# Altium PCB fpga_board.PcbDoc (part 1 of 2)
Units mil, origin at the board's own origin, x right, y up, seen from the top; angles counter-clockwise.
Board outline 3600 x 2770 mil, 6 copper layers (Top Layer, Layer 1, Layer 2, Layer 3, Layer 4, Bottom Layer), stack 32.112 mil thick; 161 components, 170 nets, 630 pads, 157 vias.
Unrouted connection lines stored in the file: 209.
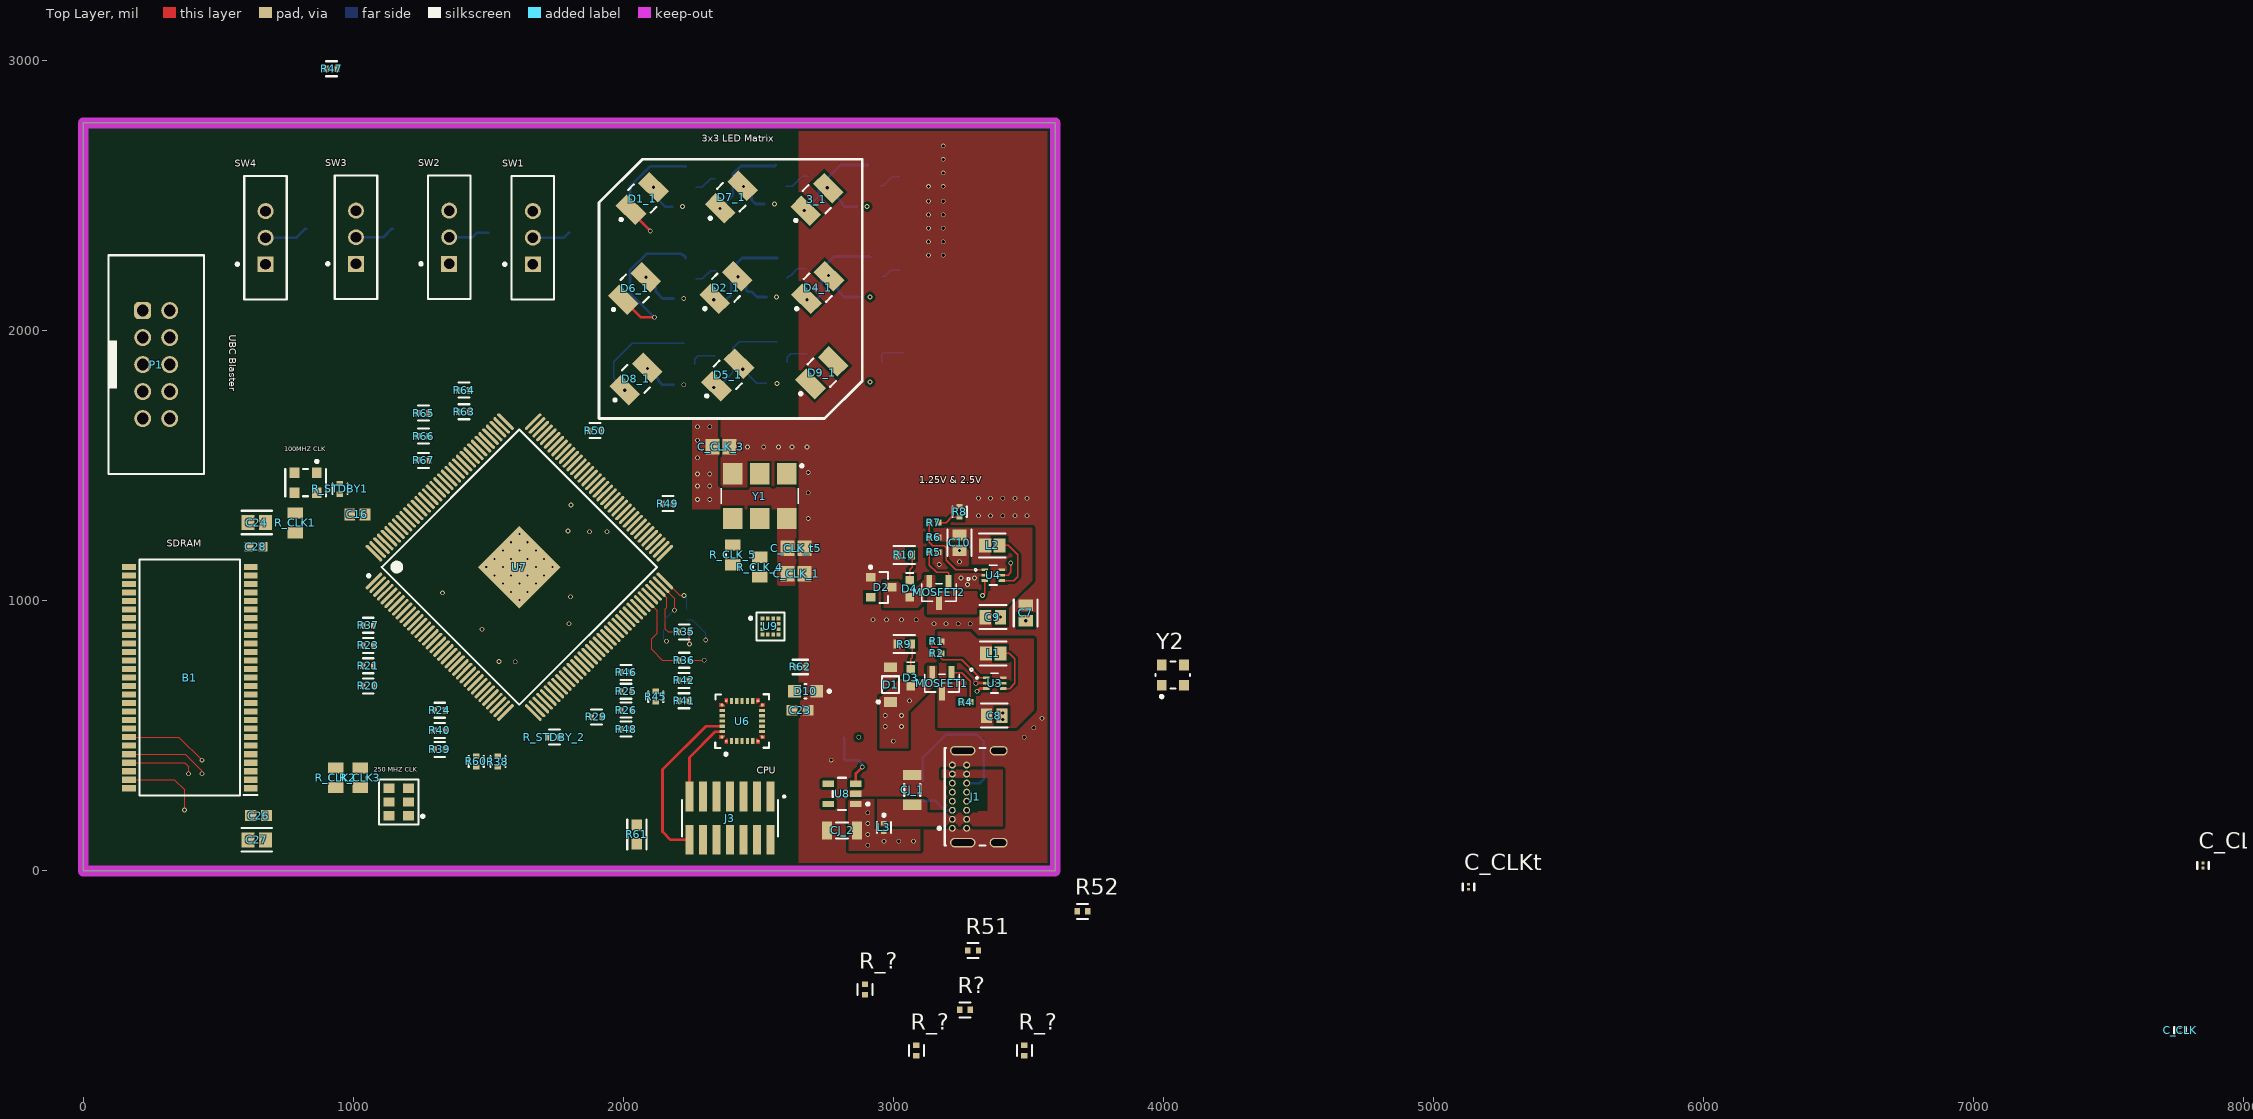
[diagram p0: Top Layer view]
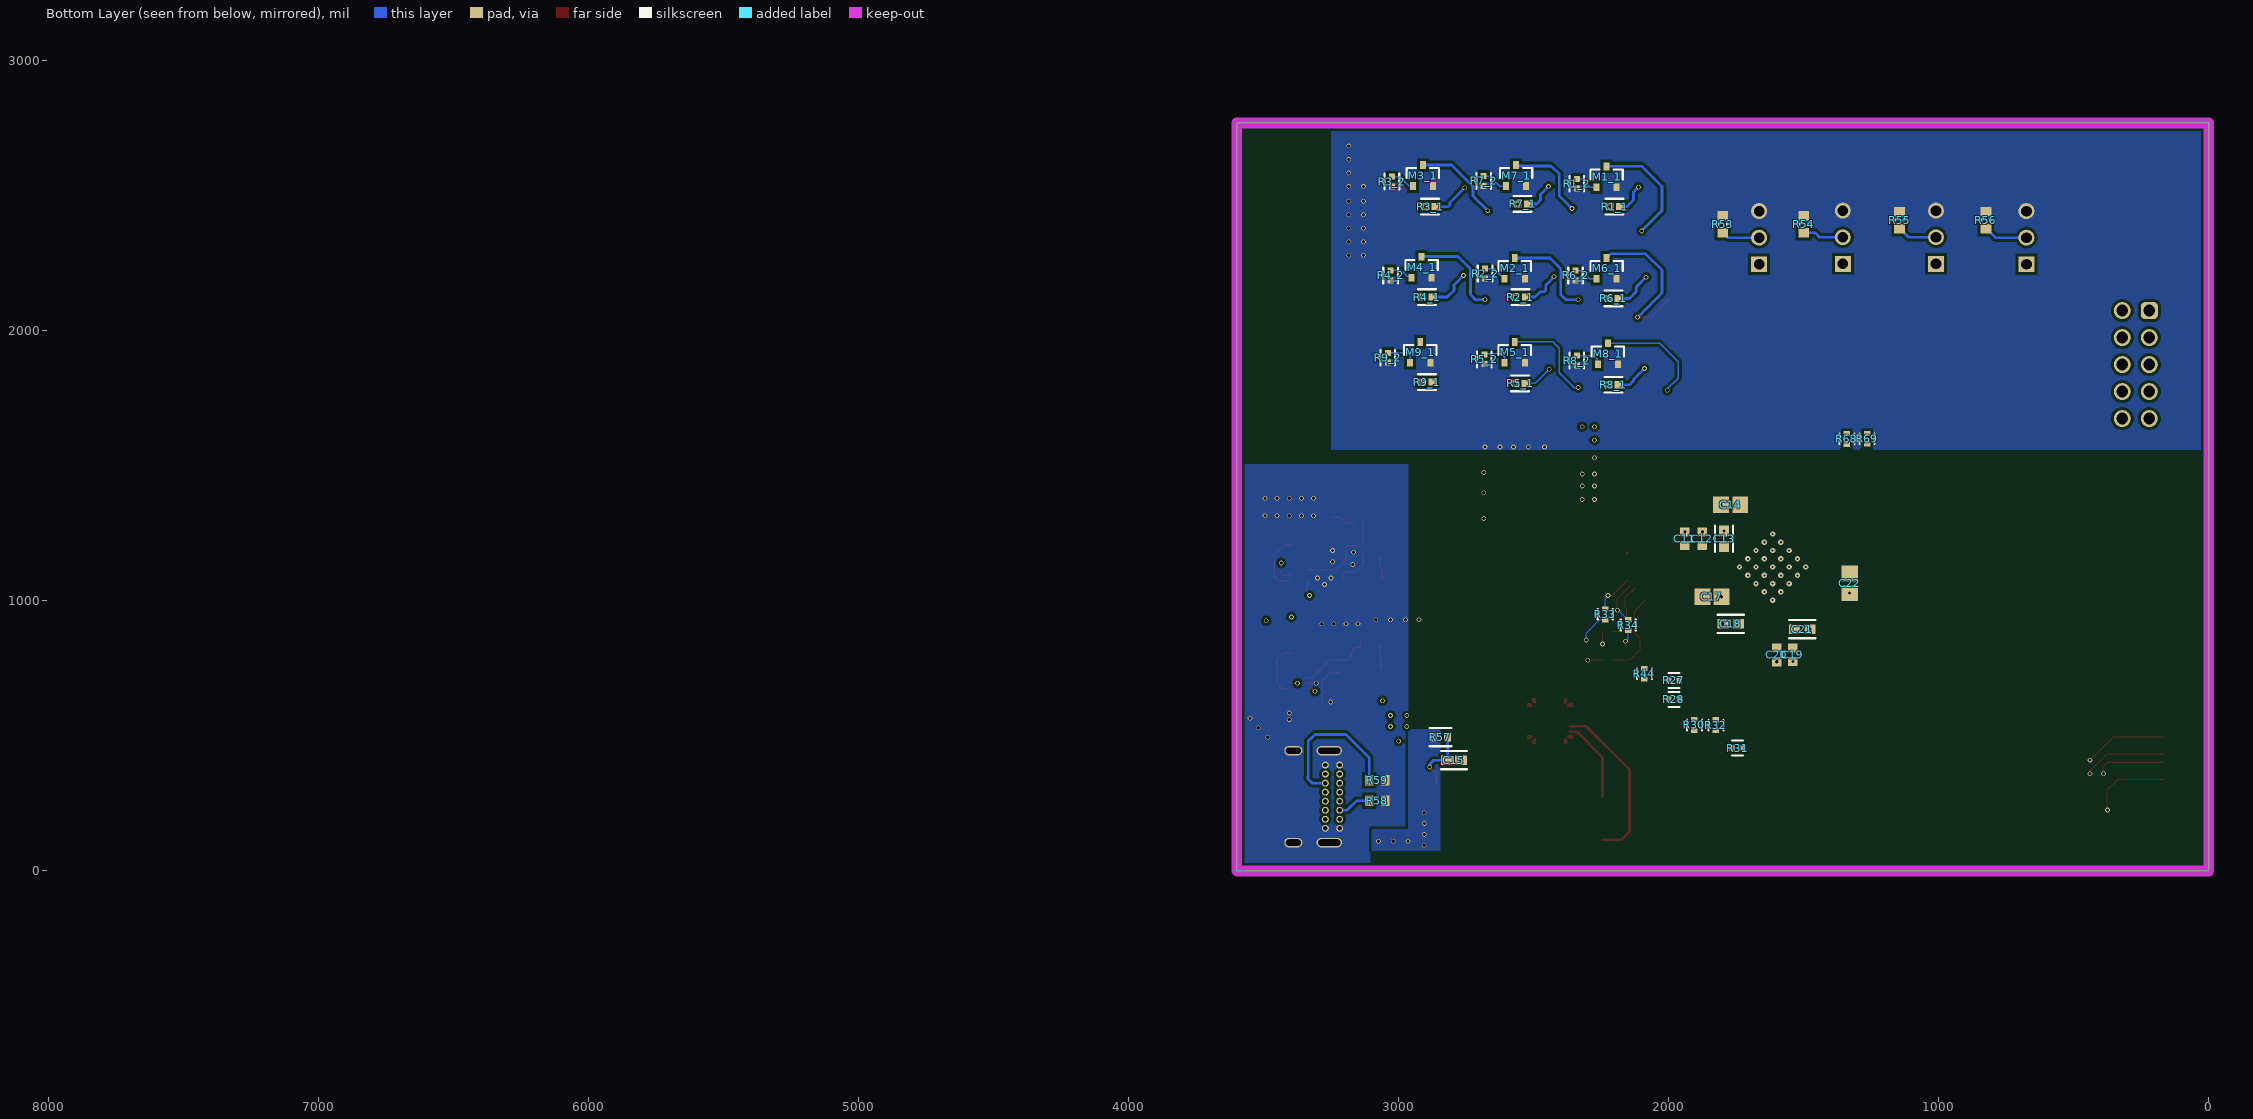
[diagram p1: Bottom Layer view, seen from below]
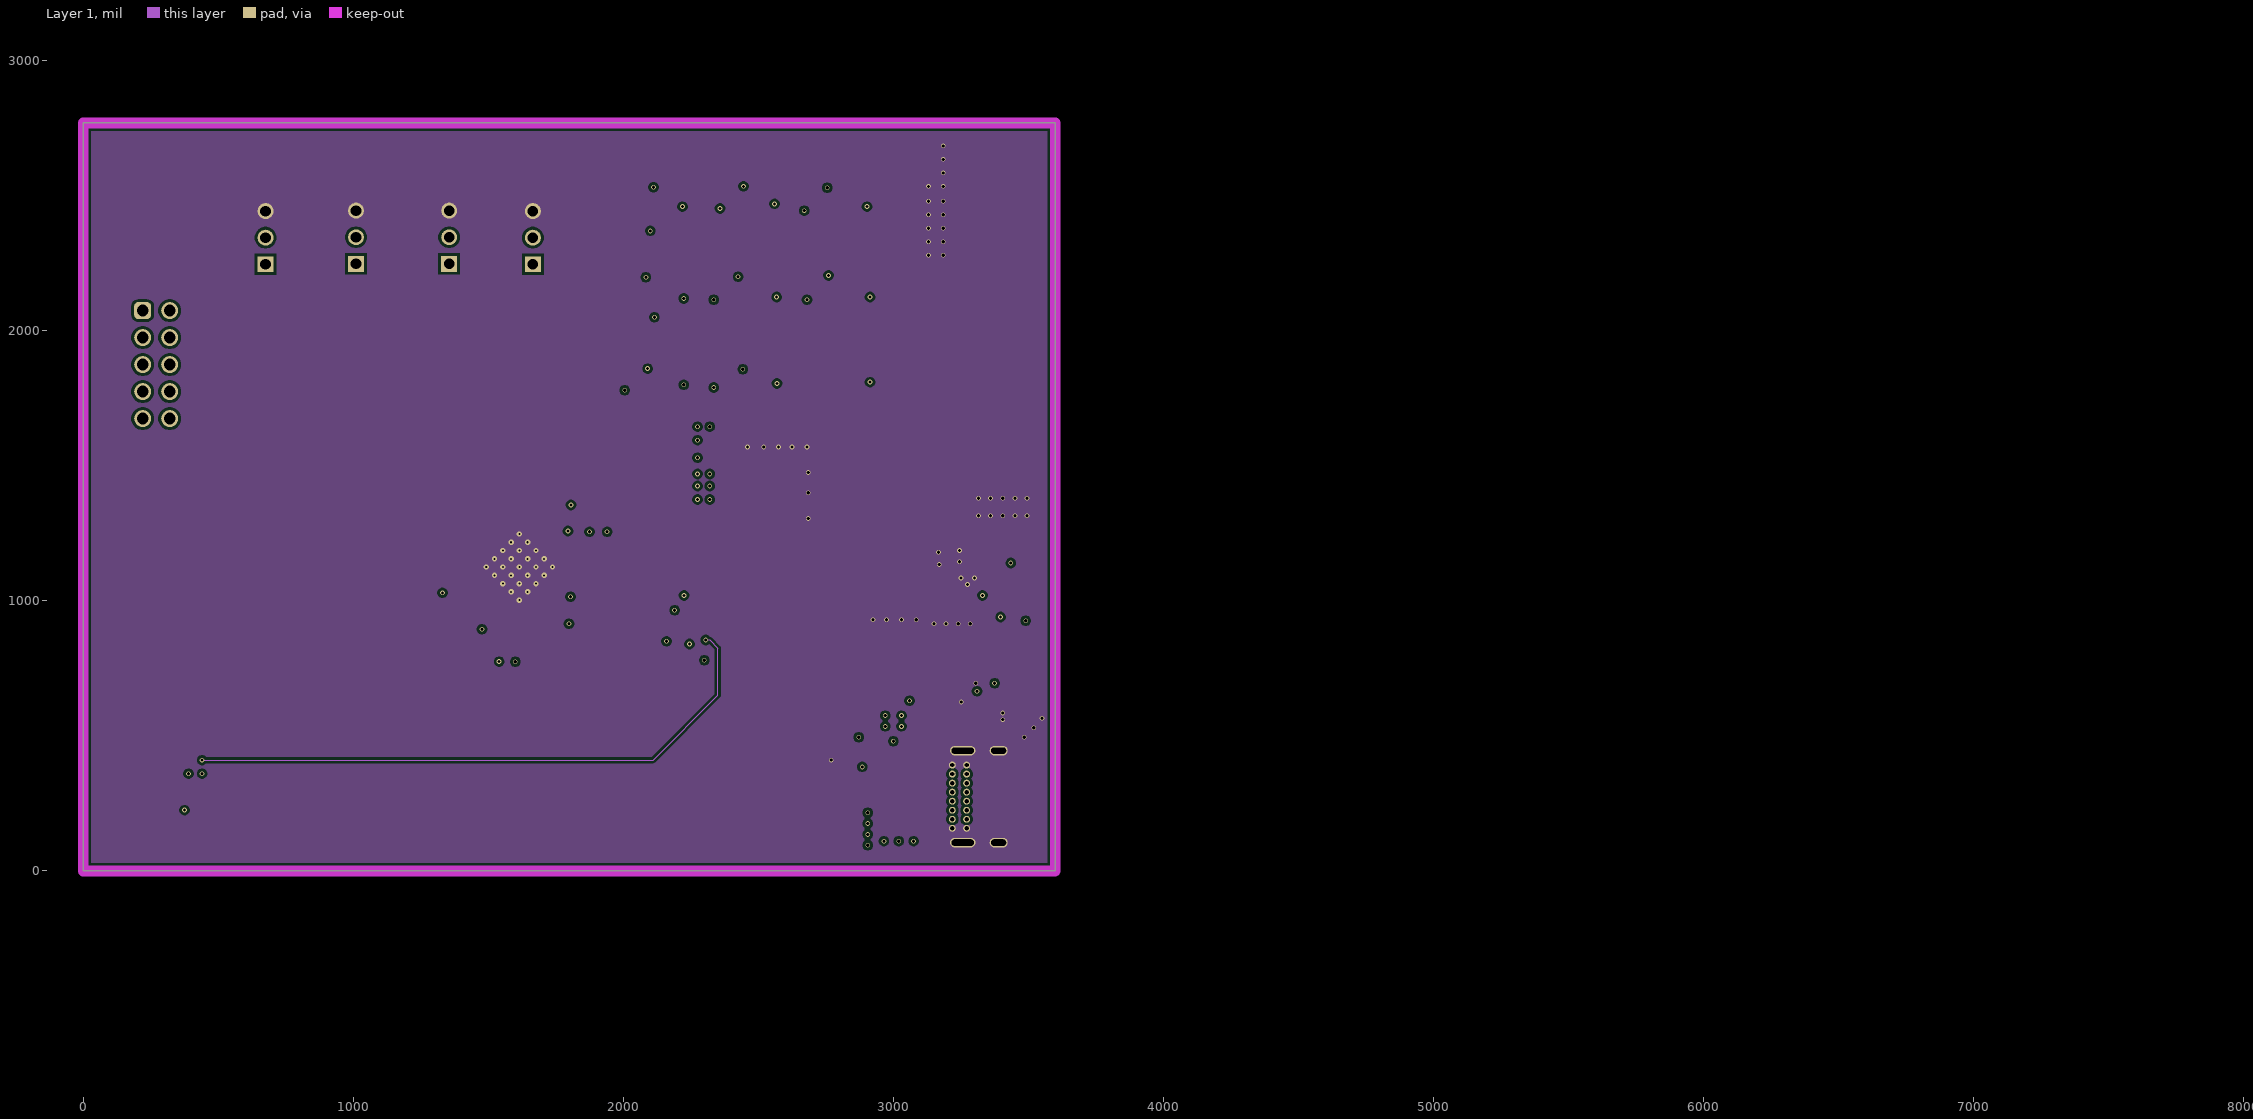
[diagram p2: Layer 1]
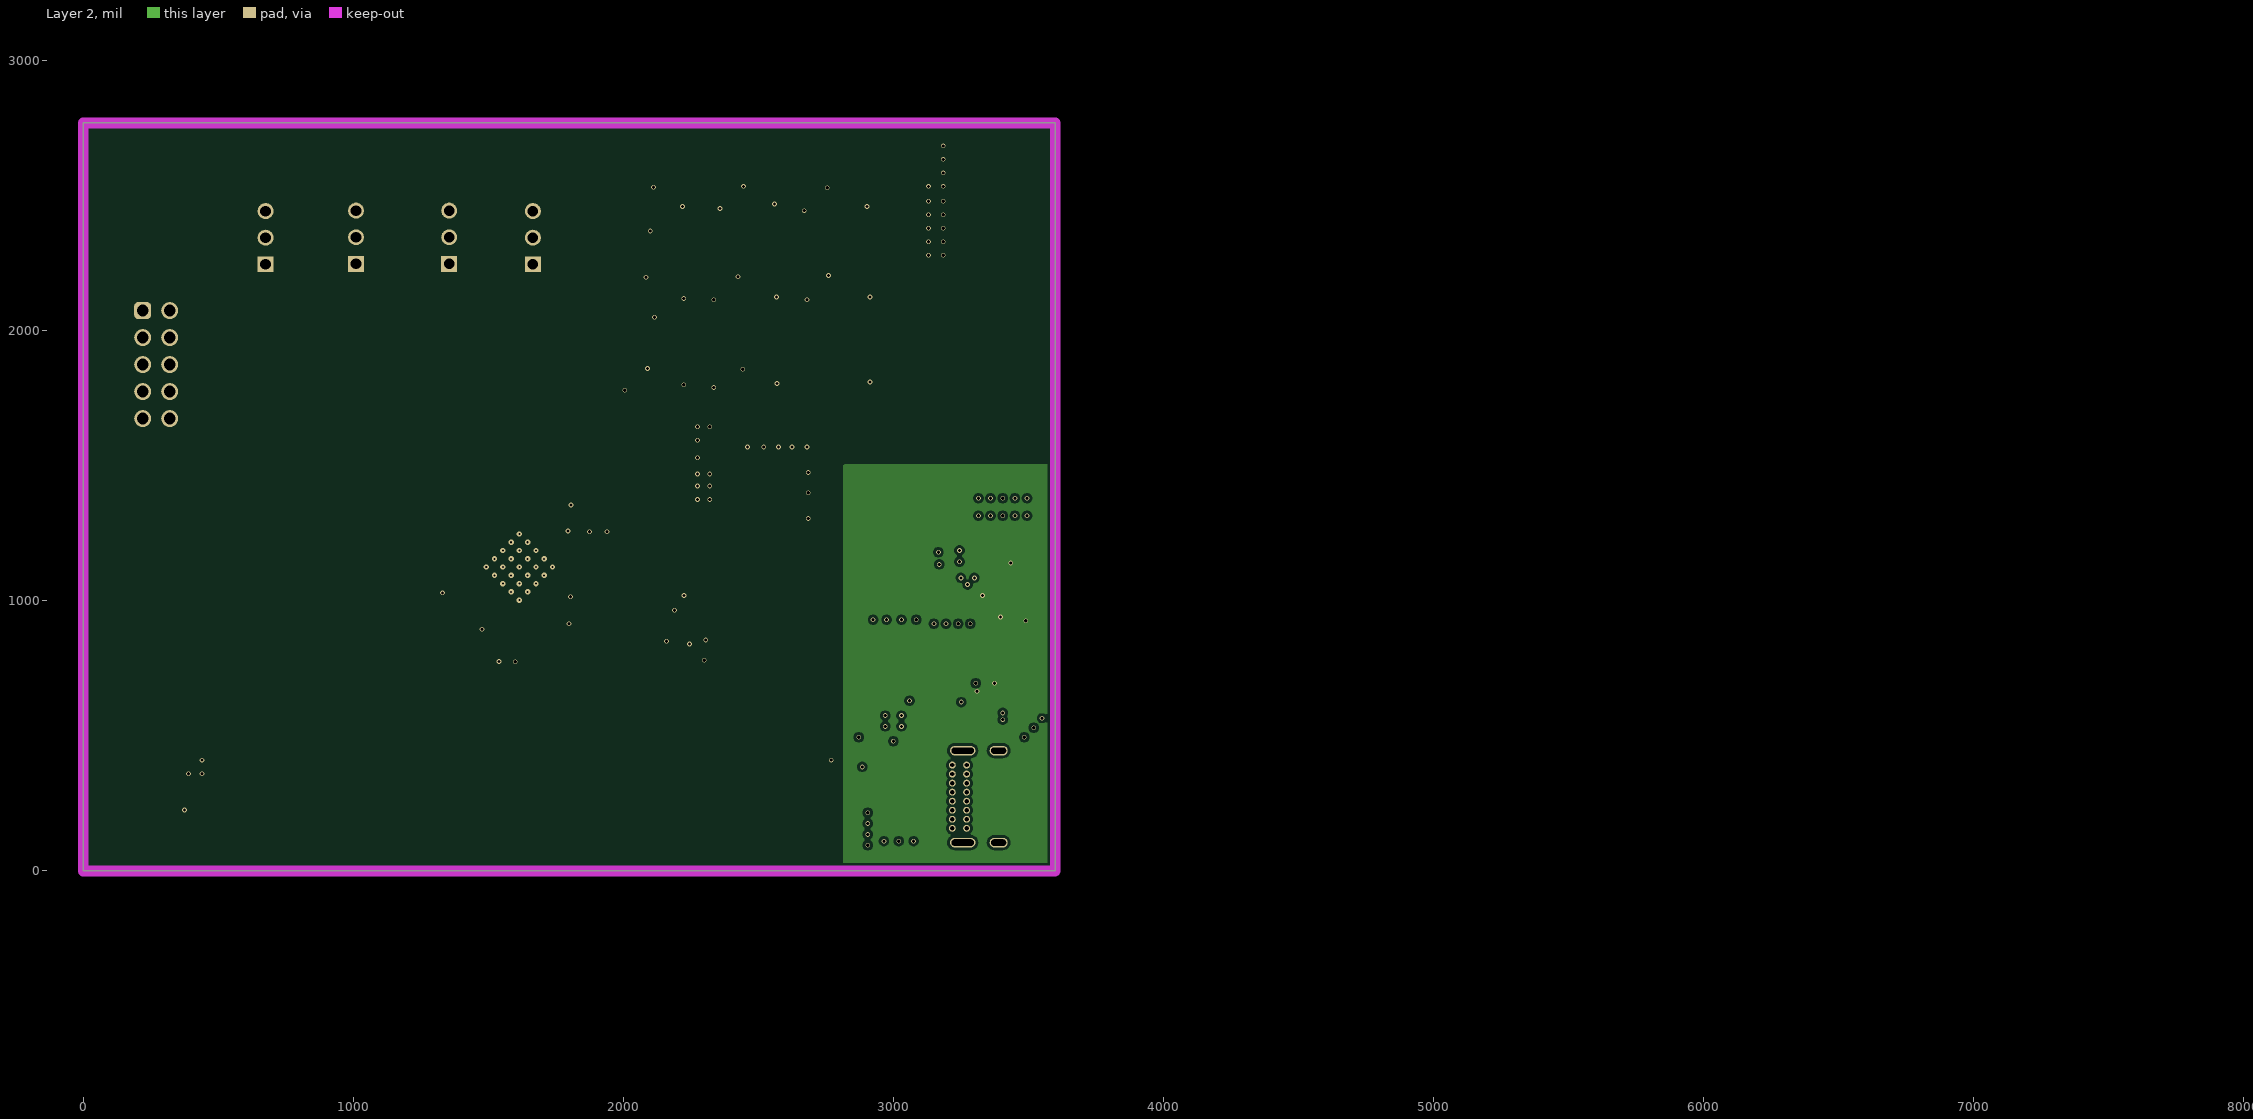
[diagram p3: Layer 2]
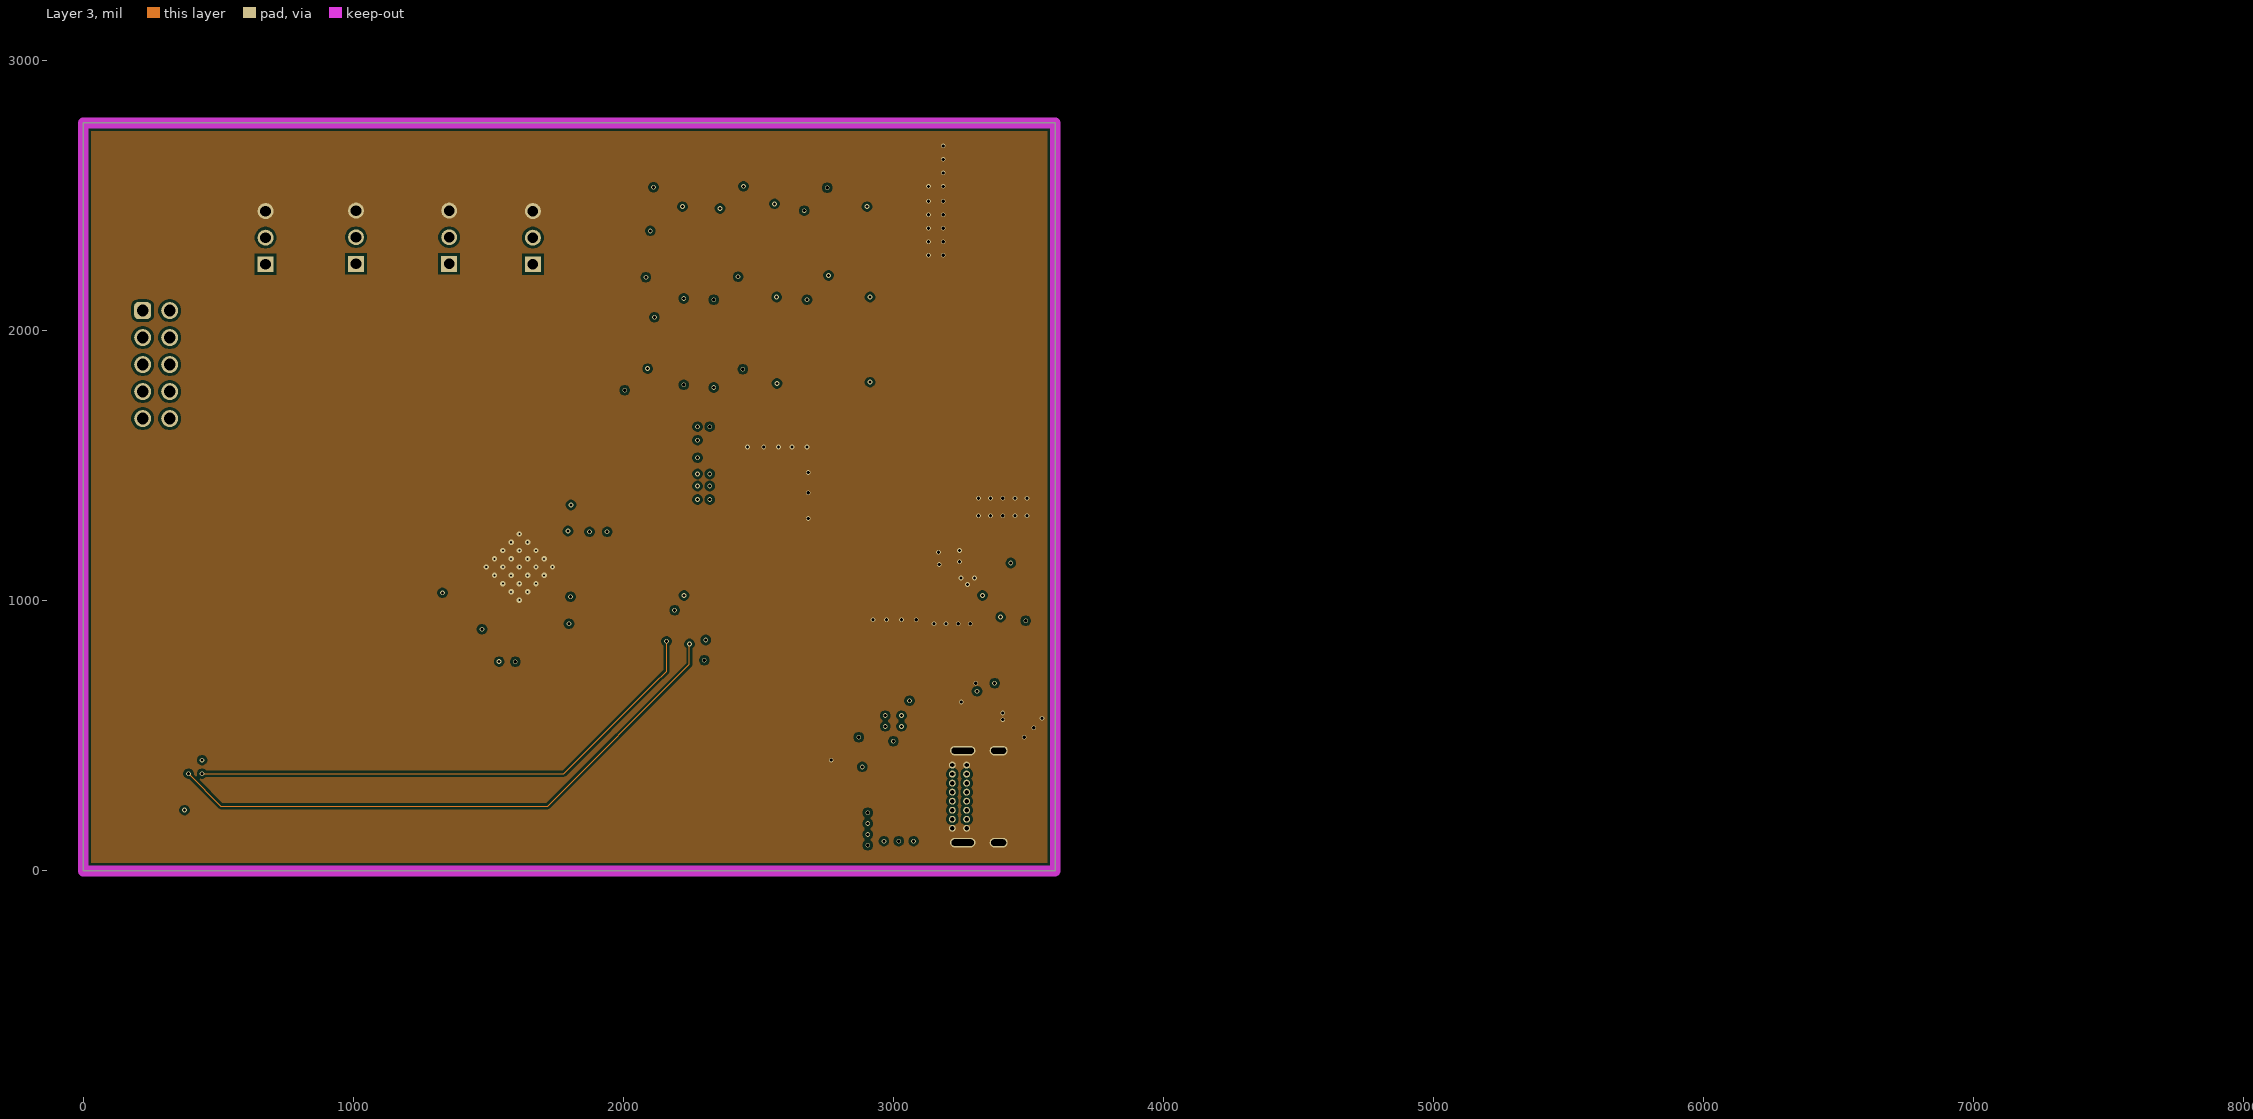
[diagram p4: Layer 3]
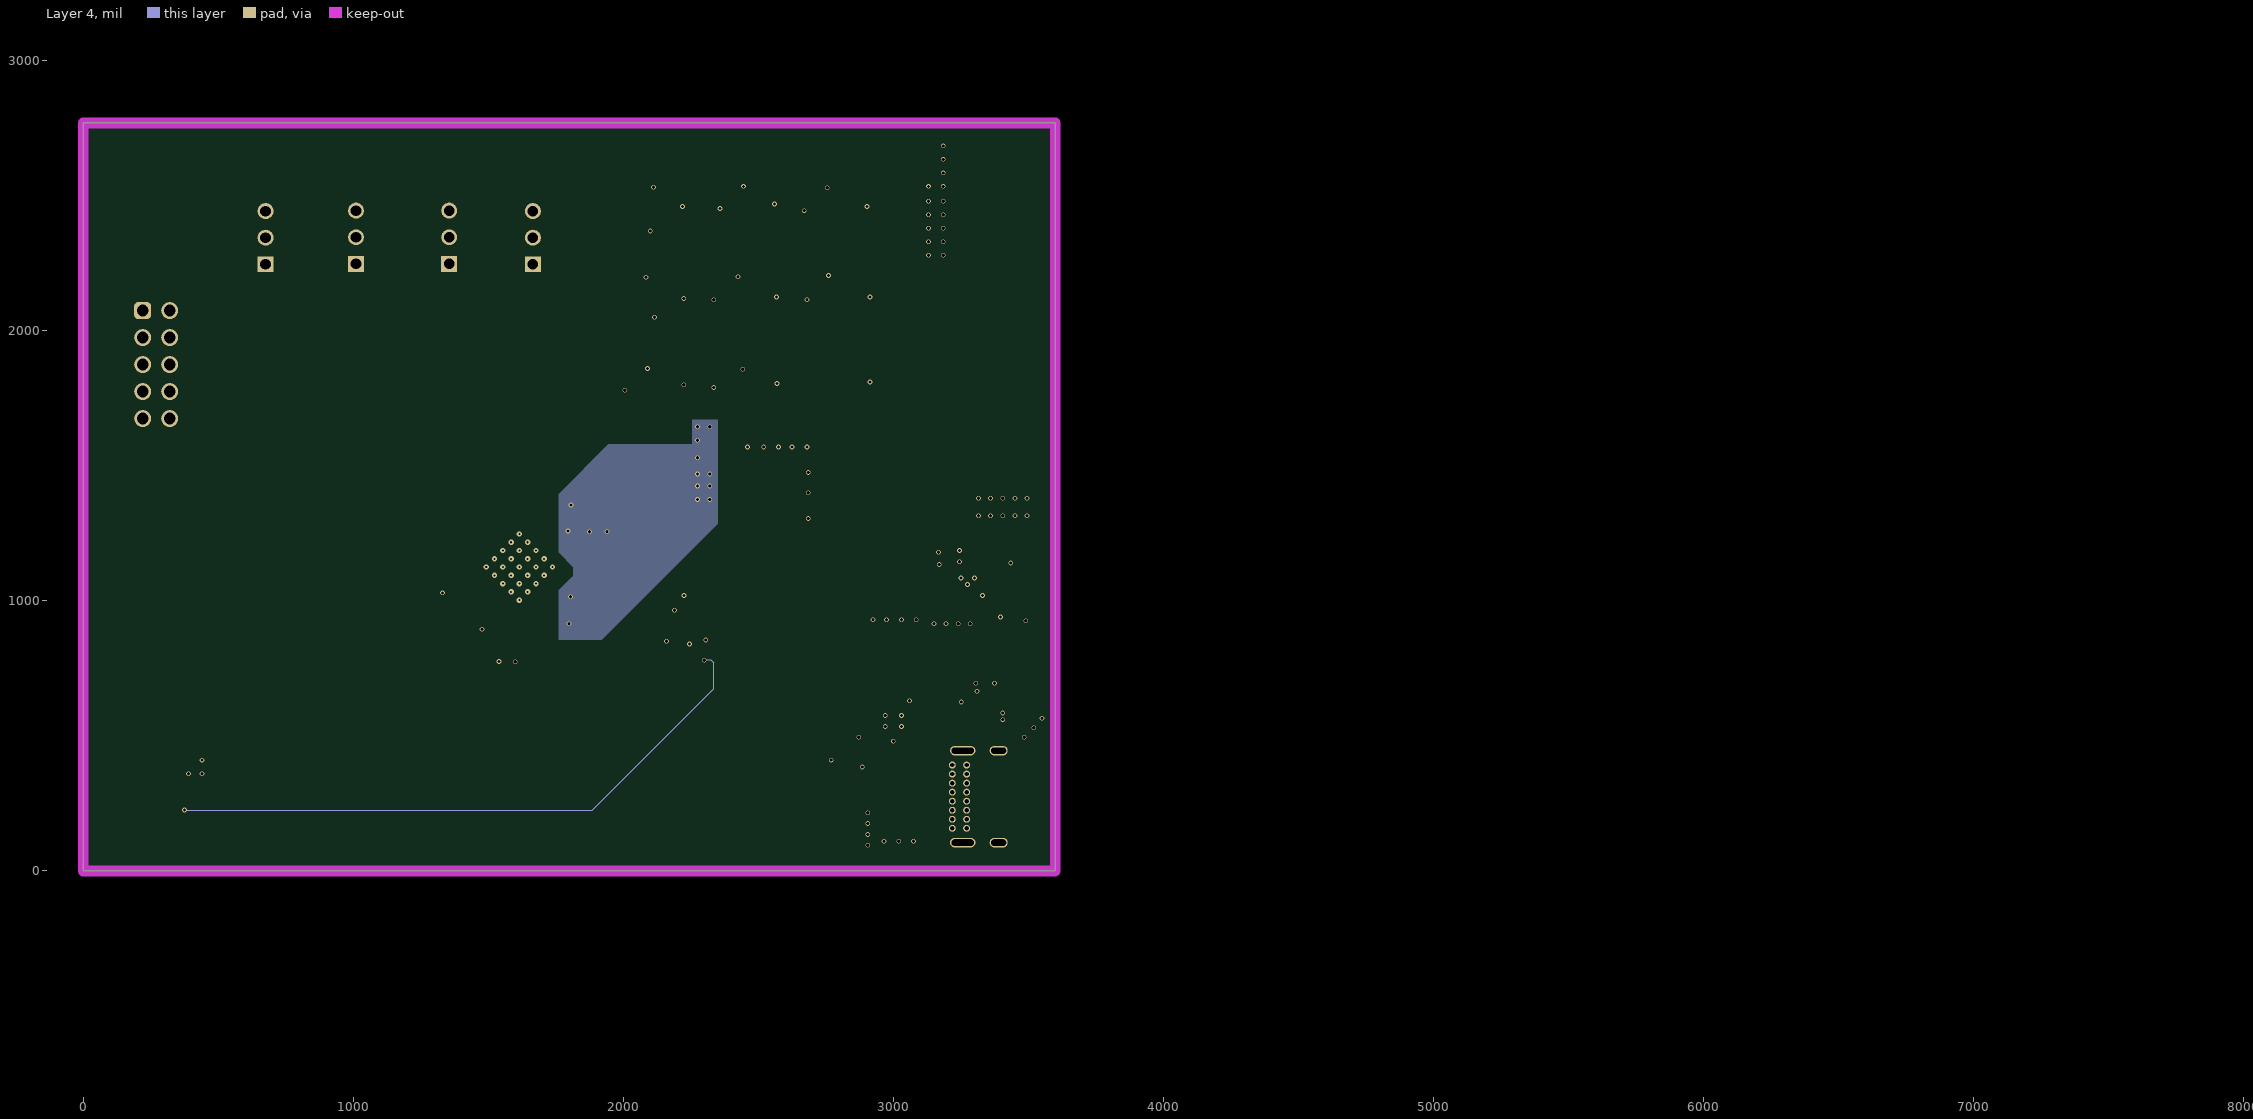
[diagram p5: Layer 4]

## Layer stack, top to bottom
Top Solder: solder mask 0.4, Solder Resist, Dk 3.5
Top Layer: signal copper 1.4
Dielectric 2: prepreg 2.8, PP-006, Dk 4.1
Layer 1: signal copper 1.378
Dielectric 3: prepreg 2.8, PP-006, Dk 4.1
Layer 2: signal copper 1.378
Dielectric 1: dielectric 12.6, FR-4, Dk 4.8
Layer 3: signal copper 1.378
Dielectric 4: prepreg 2.8, PP-006, Dk 4.1
Layer 4: signal copper 1.378
Dielectric 5: prepreg 2.8, PP-006, Dk 4.1
Bottom Layer: signal copper 1.4
Bottom Solder: solder mask 0.4, Solder Resist, Dk 3.5

## Board outline
0,0 3600,0 3600,2770 0,2770

## Design rules (kind name [scope] priority, off if disabled: settings)
Clearance [All] p1: gap=10 ignorepadtopadclearanceinfootprint=FALSE
PolygonConnect [All] p1: connectstyle=Direct reliefconductorwidth=10 reliefentries=4 polygonreliefangle="90 Angle" airgapwidth=10
RoutingVias [All] p1: holewidth=28 width=50 viastyle="Through Hole" minholewidth=28 minwidth=50 maxholewidth=28 maxwidth=50
SolderMaskExpansion [All] p1: expansion=4 istentingtop=FALSE
SupplyNets "Schematic Supply Nets_1" [InNet('3v3')] p1: voltage=0.000
SupplyNets "Schematic Supply Nets_7" [InNet('+3V3')] p2: voltage=0.000
SupplyNets "Schematic Supply Nets_3" [InNet('\')] p3: voltage=0.000
SupplyNets "Schematic Supply Nets" [InNet('GND')] p4: voltage=0.000
Width width_dram [(InNet('Data Bit 15 Term') OR InNet('Data Bit 15') OR InNet('Data Bit 14 Term') OR InNet('Data Bit 14') OR InNet('Data Bit 13 Term') OR InNet('Data Bit 13') OR InNet('Data Bit 12 Term') OR InNet('Data Bit 12'))] p1: maxlimit=1.5 minlimit=1.5 preferedwidth=1.5
Width Width_1 [All] p2: maxlimit=10 minlimit=10 preferedwidth=10
30 further rules are at their usual default settings.

## Classes and differential pairs
component class FPGA2: R20 R21 R23 R24 R25 R26 R27 R28 R29 R30 R31 R32 R33 R34 R35 R36 R37 R38 R39 R40 R41 R42 R44 R45 R46 R47 R48 R49 R50 R51 R52 R60 U7
component class Memory: B1 C26 C27 C28 DRAM FLASH_MEM_1 R? R_?
component class MCU: C15 C23 C24 CJ_1 CJ_2 D10 J1 J3 L3 R57 R58 R59 R61 R62 U6 U8
component class IOs: 3_1 D1_1 D2_1 D4_1 D5_1 D6_1 D7_1 D8_1 D9_1 M1_1 M2_1 M3_1 M4_1 M5_1 M6_1 M7_1 M8_1 M9_1 R1_1 R1_2 R2_1 R2_2 R3_1 R3_2 R4_1 R4_2 R5_1 R5_2 R6_1 R6_2 R7_1 R7_2 R8_1 R8_2 R9_1 R9_2 R53 R54 R55 R56 SW1 SW2 SW3 SW4
component class Connectors: J2 P1
component class FPGA3: C11 C12 C13 C14 C16 C17 C18 C19 C20 C21 C22 R63 R64 R65 R66 R67 R68 R69
component class Power: C7 C8 C9 C10 D1 D2 D3 D4 L1 L2 MOSFET1 MOSFET2 R1 R2 R4 R5 R6 R7 R8 R9 R10 U3 U4
component class FPGA1: "100MHZ CLK" "250 MHZ CLK" C_CLK C_CLK_1 C_CLK_3 C_CLK_4 C_CLK_t5 C_CLKt R_CLK1 R_CLK2 R_CLK3 R_CLK_4 R_CLK_5 R_STDBY1 R_STDBY_2 U9 Y1 Y2

## Components (designator, comment, footprint, x,y, rotation, side; value= is the part's Value field where it differs from the comment)
3_1 "LW T6SH.CB-CZEY-FK0PM0-Z664" FP-LW_T6SH_CB-CZEY-FK0PM0-MFG 2716.76,2486.76 r45 top
"100MHZ CLK" "ASEM1-100.000MHZ-LC-T" FP-ASEM-MFG 823.66,1437.6 r180 top
"250 MHZ CLK" "SG3225VAN 250.000000M-KEGA3" FP-SG3225-MFG 1168.58,255 r90 top
B1 "IS42S16160J-7TLI" SOP80P1176X120-54N 394.49,716.02 r180 top
C7 "GRT21BR61E226ME13L" FP-GRT21B-0_2-IPC_C 3490,955 r90 top
C8 "GRT21BR61E226ME13L" FP-GRT21B-0_2-IPC_C 3373.57,575 r0 top
C9 "GRT21BR61E226ME13L" FP-GRT21B-0_2-IPC_C 3368.57,940 r180 top
C10 "GRT21BR61E226ME13L" FP-GRT21B-0_2-IPC_C 3245,1215 r270 top
C11 "C0603C105K9PACTU" CAPC1608X90X35LL15T15 1940,1230 r90 bottom
C12 "C0603C105K9PACTU" CAPC1608X90X35LL15T15 1875,1230 r90 bottom
C13 "GCG188R91H104MA01D" FP-GCG188-0_2-IPC_B 1795,1230 r270 bottom
C14 "C0805S472K5RACTU" CAPC2013X145X50ML20T25 1770.43,1355 r0 bottom
C15 "C1608X5R1H105K080AB" FP-C1608-080-0_1-IPC_B 2795,410 r0 bottom
C16 "C0603S102K4RACTU" CAPC1608X87X35ML15T15 1015,1320 r0 top
C17 "C0805S472K5RACTU" CAPC2013X145X50ML20T25 1840,1015 r180 bottom
C18 "GCG188R91H104MA01D" FP-GCG188-0_2-IPC_B 1770,915 r180 bottom
C19 "C0603C105K9PACTU" CAPC1608X90X35LL15T15 1540,800.59 r270 bottom
C20 "C0603C105K9PACTU" CAPC1608X90X35LL15T15 1600,800 r270 bottom
C21 "GCG188R91H104MA01D" FP-GCG188-0_2-IPC_B 1505,895 r0 bottom
C22 "C0805S472K5RACTU" CAPC2013X145X50ML20T25 1330,1065 r270 bottom
C23 "LD033C104KAB2A" CAPC1608X90X35NL15T15 2654.53,595 r180 top
C24 "GRM219R61E475MA73J" FP-GRM219-0_15-0_1-IPC_B 642.53,1290 r180 top
C26 "LD033C104KAB2A" CAPC1608X90X35NL15T15 649.53,205 r180 top
C27 "GRM219R61E475MA73J" FP-GRM219-0_15-0_1-IPC_B 642.47,115 r180 top
C28 "C0603C105K9PACTU" CAPC1608X90X35LL15T15 639.41,1200 r180 top
C_CLK "GRM033C71C104KE14D" FP-GRM033-0_03-MFG 7765,-590 r90 top
C_CLK_1 "C0805C105K8PACTU" CAPC2013X145X50NL20T25 2640,1100 r180 top
C_CLK_3 "C0805C105K8PACTU" CAPC2013X145X50NL20T25 2361.5,1570 r180 top
C_CLK_4 "GRM033C71C104KE14D" FP-GRM033-0_03-MFG 7850,20 r90 top
C_CLK_t5 "C0805C105K8PACTU" CAPC2013X145X50NL20T25 2640,1195 r180 top
C_CLKt "GRM033C71C104KE14D" FP-GRM033-0_03-MFG 5130,-59.35 r90 top
CJ_1 "100nF" CAPC1206(3216)170_L 3070,300 r270 top
CJ_2 "100nF" CAPC1206(3216)170_L 2810,150 r0 top
D1 "SZMMSZ4678T1G" ONSC-SOD-123-2-425-04_V 2990,690 r90 top
D1_1 "LW T6SH.CB-CZEY-FK0PM0-Z664" FP-LW_T6SH_CB-CZEY-FK0PM0-MFG 2070,2490 r45 top
D2 "MMBZ5223BLT1G" ONSC-SOT-23-3-318-08_V 2955,1050 r0 top
D2_1 "LW T6SH.CB-CZEY-FK0PM0-Z664" FP-LW_T6SH_CB-CZEY-FK0PM0-MFG 2380,2160 r45 top
D3 "150060VS75000" WL-SMCW_0603_150060xx75000 3065,715 r270 top
D4 "150060VS75000" WL-SMCW_0603_150060xx75000 3060,1045 r270 top
D4_1 "LW T6SH.CB-CZEY-FK0PM0-Z664" FP-LW_T6SH_CB-CZEY-FK0PM0-MFG 2720,2160 r45 top
D5_1 "LW T6SH.CB-CZEY-FK0PM0-Z664" FP-LW_T6SH_CB-CZEY-FK0PM0-MFG 2386.76,1836.76 r45 top
D6_1 "LW T6SH.CB-CZEY-FK0PM0-Z664" FP-LW_T6SH_CB-CZEY-FK0PM0-MFG 2041.76,2156.76 r45 top
D7_1 "LW T6SH.CB-CZEY-FK0PM0-Z664" FP-LW_T6SH_CB-CZEY-FK0PM0-MFG 2400,2495 r45 top
D8_1 "LW T6SH.CB-CZEY-FK0PM0-Z664" FP-LW_T6SH_CB-CZEY-FK0PM0-MFG 2046.76,1821.76 r45 top
D9_1 "LW T6SH.CB-CZEY-FK0PM0-Z664" FP-LW_T6SH_CB-CZEY-FK0PM0-MFG 2735,1845 r45 top
D10 "LTST-C170GKT" FP-LTST-C170GKT-MFG 2675,665 r180 top
J1 "USB4085-GF-A" FP-USB4085-GF-A-MFG 3376.81,274.72 r90 top
J3 "FTSH-107-01-F-DV-K-P-TR" SAMTEC_FTSH-107-01-F-DV-K-P-TR 2395,195 r180 top
L1 "MLP2012H2R2MT0S1" FP-MLP2012M-IPC_C 3370,805 r180 top
L2 "MLP2012H2R2MT0S1" FP-MLP2012M-IPC_C 3366.61,1205 r180 top
L3 "120 R" FP-LQG15HH_02-MFG 2965,160.75 r270 top
M1_1 "SI2342DS-T1-GE3" FP-S-03946-MFG 2230,2570 r90 bottom
M2_1 "SI2342DS-T1-GE3" FP-S-03946-MFG 2570,2231.24 r90 bottom
M3_1 "SI2342DS-T1-GE3" FP-S-03946-MFG 2910,2575 r90 bottom
M4_1 "SI2342DS-T1-GE3" FP-S-03946-MFG 2915,2235 r90 bottom
M5_1 "SI2342DS-T1-GE3" FP-S-03946-MFG 2570,1920 r90 bottom
M6_1 "SI2342DS-T1-GE3" FP-S-03946-MFG 2230,2231.24 r90 bottom
M7_1 "SI2342DS-T1-GE3" FP-S-03946-MFG 2565,2575 r90 bottom
M8_1 "SI2342DS-T1-GE3" FP-S-03946-MFG 2225,1915 r90 bottom
M9_1 "SI2342DS-T1-GE3" FP-S-03946-MFG 2920,1920 r90 bottom
MOSFET1 "DMP3068L-7" SOT-23_DMP3068L_DIO 3180,695 r180 top
MOSFET2 "DMP3068L-7" SOT-23_DMP3068L_DIO 3168.98,1031 r180 top
P1 "61201021621" 61201021621 270,1875 r270 top
R1 "ERJ-2RKF2003X" RESC1005X40X25NL05T05 3160,850 r180 top
R1_1 "270Ω" FP-CR0402-IPC_A 2200,2460 r180 bottom
R1_2 "100kΩ" FP-TFCR0402-IPC_B 2340,2545 r90 bottom
R2 "RC0402FR-07100KL" RESC1005X40X25NL05T10 3160,805 r180 top
R2_1 "CR0402-JW-271GLF" FP-CR0402-IPC_A 2548.84,2125 r180 bottom
R2_2 "100kΩ" FP-TFCR0402-IPC_B 2680,2212.14 r90 bottom
R3_1 "CR0402-JW-271GLF" FP-CR0402-IPC_A 2883.84,2460 r180 bottom
R3_2 "100kΩ" FP-TFCR0402-IPC_B 3025,2552.86 r90 bottom
R4 "RC0402FR-07100KL" RESC1005X40X25NL05T10 3268.27,625 r180 top
R4_1 "CR0402-JW-271GLF" FP-CR0402-IPC_A 2895,2125 r180 bottom
R4_2 "100kΩ" FP-TFCR0402-IPC_B 3030,2205 r90 bottom
R5 "RC0402FR-07100KL" RESC1005X40X25NL05T10 3150,1180 r0 top
R5_1 "CR0402-JW-271GLF" FP-CR0402-IPC_A 2550,1805 r180 bottom
R5_2 "100kΩ" FP-TFCR0402-IPC_B 2682.8,1894.18 r90 bottom
R6 "ERJ-2RKF2003X" RESC1005X40X25NL05T05 3150,1235 r180 top
R6_1 "CR0402-JW-271GLF" FP-CR0402-IPC_A 2205,2120 r180 bottom
R6_2 "100kΩ" FP-TFCR0402-IPC_B 2345,2205 r90 bottom
R7 "RC0402FR-0744K2L" RESC1005X40X25NL05T10 3150,1290 r0 top
R7_1 "CR0402-JW-271GLF" FP-CR0402-IPC_A 2541.16,2470 r180 bottom
R7_2 "100kΩ" FP-TFCR0402-IPC_B 2685,2555 r90 bottom
R8 "RC0402FR-0720KL" FP-RC0402-0_4-MFG 3245,1330 r90 top
R8_1 "CR0402-JW-271GLF" FP-CR0402-IPC_A 2205,1800 r180 bottom
R8_2 "100kΩ" FP-TFCR0402-IPC_B 2340,1890 r90 bottom
R9 "RC0603FR-0710KL" FP-RC0603-0_55-IPC_C 3040,840 r0 top
R9_1 "CR0402-JW-271GLF" FP-CR0402-IPC_A 2895,1810 r180 bottom
R9_2 "100kΩ" FP-TFCR0402-IPC_B 3040,1900 r90 bottom
R10 "RC0603FR-0710KL" FP-RC0603-0_55-IPC_C 3040,1170 r0 top
R20 "RT0402BRE0750RL" FP-RT0402-0_35-MFG 1055,685 r0 top
R21 "RT0402BRE0750RL" FP-RT0402-0_35-MFG 1055,760 r0 top
R23 "RT0402BRE0750RL" FP-RT0402-0_35-MFG 1055.31,835 r0 top
R24 "RT0402BRE0750RL" FP-RT0402-0_35-MFG 1320.31,595 r0 top
R25 "RT0402BRE0750RL" FP-RT0402-0_35-MFG 2010.31,665 r180 top
R26 "RT0402BRE0750RL" FP-RT0402-0_35-MFG 2010.31,595 r180 top
R27 "RT0402BRE0750RL" FP-RT0402-0_35-MFG 1980.31,705 r180 bottom
R28 "RT0402BRE0750RL" FP-RT0402-0_35-MFG 1980.31,635 r180 bottom
R29 "RT0402BRE0750RL" FP-RT0402-0_35-MFG 1900.31,570 r180 top
R30 "RT0402BRE0750RL" FP-RT0402-0_35-MFG 1905,540.32 r90 bottom
R31 "RT0402BRE0750RL" FP-RT0402-0_35-MFG 1744.69,455 r0 bottom
R32 "RT0402BRE0750RL" FP-RT0402-0_35-MFG 1825,539.68 r90 bottom
R33 "RT0402BRE0750RL" FP-RT0402-0_35-MFG 2235,950 r90 bottom
R34 "RT0402BRE0750RL" FP-RT0402-0_35-MFG 2150,910.32 r90 bottom
R35 "RT0402BRE0750RL" FP-RT0402-0_35-MFG 2225.31,885 r180 top
R36 "RT0402BRE0750RL" FP-RT0402-0_35-MFG 2225.31,780 r180 top
R37 "RT0402BRE0750RL" FP-RT0402-0_35-MFG 1055,910 r0 top
R38 "RT0402BRE0750RL" FP-RT0402-0_35-MFG 1535,405 r90 top
R39 "RT0402BRE0750RL" FP-RT0402-0_35-MFG 1320,450 r0 top
R40 "RT0402BRE0750RL" FP-RT0402-0_35-MFG 1320,520 r0 top
R41 "RT0402BRE0750RL" FP-RT0402-0_35-MFG 2225,630 r180 top
R42 "RT0402BRE0750RL" FP-RT0402-0_35-MFG 2224.69,705 r180 top
R44 "RT0402BRE0750RL" FP-RT0402-0_35-MFG 2090,730 r90 bottom
R45 "RT0402BRE0750RL" FP-RT0402-0_35-MFG 2120,645 r90 top
R46 "RT0402BRE0750RL" FP-RT0402-0_35-MFG 2010,735 r180 top
R47 "RT0402BRE0750RL" FP-RT0402-0_35-MFG 919.69,2970.19 r180 top
R48 "RT0402BRE0750RL" FP-RT0402-0_35-MFG 2010,525 r180 top
R49 "RT0402BRE0750RL" FP-RT0402-0_35-MFG 2165,1360 r180 top
R50 "RT0402BRE0750RL" FP-RT0402-0_35-MFG 1895.31,1630 r180 top
R51 "RT0402BRE0750RL" FP-RT0402-0_35-MFG 3295.31,-295 r0 top
R52 "RT0402BRE0750RL" FP-RT0402-0_35-MFG 3700.31,-150 r0 top
R53 "3K3 5% 0603(1608)" RESC0603(1608)_N 1800,2395 r270 bottom value="3300.00 Ohm"
R54 "3K3 5% 0603(1608)" RESC0603(1608)_N 1500,2395 r270 bottom value="3300.00 Ohm"
R55 "3K3 5% 0603(1608)" RESC0603(1608)_N 1145,2410 r270 bottom value="3300.00 Ohm"
R56 "3K3 5% 0603(1608)" RESC0603(1608)_N 825,2410 r270 bottom value="3300.00 Ohm"
R57 "RC0603FR-0710KL" FP-RC0603-0_55-IPC_C 2845,495 r0 bottom
R58 "RC0603FR-075K1L" RESC1608X55X25ML10T15 3079.53,260 r180 bottom
R59 "RC0603FR-075K1L" RESC1608X55X25ML10T15 3079.53,335 r180 bottom
R60 "RT0402BRE0750RL" FP-RT0402-0_35-MFG 1455,405.32 r90 top
R61 "AC0603JR-0747KL" FP-AC0603-IPC_A 2050,135 r270 top
R62 "TFCR0402-16W-C-1002BT" FP-TFCR0402-IPC_B 2655,755 r180 top
R63 "RT0402BRE0750RL" FP-RT0402-0_35-MFG 1410,1700 r180 top
R64 "RT0402BRE0750RL" FP-RT0402-0_35-MFG 1410,1780 r180 top
R65 "RT0402BRE0750RL" FP-RT0402-0_35-MFG 1260,1695 r180 top
R66 "RT0402BRE0750RL" FP-RT0402-0_35-MFG 1260,1610 r180 top
R67 "RT0402BRE0750RL" FP-RT0402-0_35-MFG 1260.31,1520 r180 top
R68 "RT0402BRE0750RL" FP-RT0402-0_35-MFG 1340,1600 r90 bottom
R69 "RT0402BRE0750RL" FP-RT0402-0_35-MFG 1265,1600.32 r270 bottom
R? "RT0402BRE0750RL" FP-RT0402-0_35-MFG 3265,-515 r0 top
R_? "RT0402BRE0710KL" FP-RT0402-MFG 3485,-665 r90 top value=10KΩ
R_? "RT0402BRE0710KL" FP-RT0402-MFG 2895,-439.68 r90 top value=10KΩ
R_? "RT0402BRE0710KL" FP-RT0402-MFG 3085,-665 r90 top value=10KΩ
R_CLK1 "CRCW080522R0JNTA" RESC2013X50X30NL20T20 785,1288.58 r90 top
R_CLK2 "CRCW080522R0JNTA" RESC2013X50X30NL20T20 935,345 r270 top
R_CLK3 "CRCW080522R0JNTA" RESC2013X50X30NL20T20 1025,345 r270 top
R_CLK_4 "CRCW080522R0JNTA" RESC2013X50X30NL20T20 2505,1125 r270 top
R_CLK_5 "CRCW080522R0JNTA" RESC2013X50X30NL20T20 2405,1170 r270 top
R_STDBY1 "RT0402BRE0710KL" FP-RT0402-MFG 950,1414.68 r90 top value=10KΩ
R_STDBY_2 "RT0402BRE0710KL" FP-RT0402-MFG 1744.69,495 r180 top value=10KΩ
SW1 "EG1218" ESWI-EG1218_V 1665,2345 r90 top
SW2 "EG1218" ESWI-EG1218_V 1355,2346.57 r90 top
SW3 "EG1218" ESWI-EG1218_V 1010,2346.57 r90 top
SW4 "EG1218" ESWI-EG1218_V 675,2345 r90 top
U3 "AP61300Z6-7" AP61300Z6-7_DIO 3375,695 r0 top
U4 "AP61300Z6-7" AP61300Z6-7_DIO 3370,1095 r0 top
U6 "STM32G031G8U6" FP-UFQFPN28-A0B0-MFG 2440,555 r90 top
U7 "EP4CE6E22C8N" EQFP144_A-165_D2-54_M 1615,1125 r45 top
U8 "TLV73333PDBVR" FP-DBV0005A-MFG 2810,285 r180 top
U9 "LIS2DW12TR" FP-LGA12-DM00170568-MFG 2545,905 r0 top
Y1 "XLL736300.000000I" JU6_MFG 2505,1387.68 r270 top
Y2 "ASEMB-50.000MHZ-LC-T" FP-ASEMB-MFG 4035,725 r0 top

## Footprints (in the part's own frame and the unit in brackets; to place one, negate y for a bottom-side part, rotate by r counter-clockwise, add the part's x,y. Pads: shape width x height; smd on the part's side, far side on the other; paste and mask are expansions set on the pad)
61201021621 [mm] "10 pins, straight, gold plating"
  rrect50% 1.6x1.6 hole 1.1: 1(-5.08,-1.27)
  round 1.6 hole 1.1: 2(-5.08,1.27) 3(-2.54,-1.27) 4(-2.54,1.27) 5(0,-1.27) 6(0,1.27) 7(2.54,-1.27) 8(2.54,1.27) 9(5.08,-1.27) 10(5.08,1.27)
  silkscreen extent -10.28,-4.5 10.28,4.5, body extent -10.18,-4.42 10.18,4.75, height 9.13
AP61300Z6-7_DIO [mil]
  rect 24x10 smd paste+0 mask+0: 1(-31.5,19.68) 2(-31.5,0) 3(-31.5,-19.68) 4(31.5,-19.68) 5(31.5,0) 6(31.5,19.68)
  silkscreen extent -69,-36 14,36, body extent -31,-31 31,31, height 24
CAPC1206(3216)170_L [mm] "Chip Capacitor, Body 3.2x1.6mm, Height 1.7mm, IPC High Density"
  rect 0.95x1.7 smd: 1(-1.4,0) 2(1.4,0)
  silkscreen extent -0.55,-0.75 0.55,0.75, body extent -1.7,-0.9 1.7,0.9, height 1.7
CAPC1608X87X35ML15T15 [mm] "Chip Capacitor, 2-Leads, Body 1.60x0.80mm, IPC Low Density"
  rect 1x1.1 smd: 1(-0.725,0) 2(0.725,0)
  body extent -0.87,-0.48 0.87,0.47, height 0.87
CAPC1608X90X35LL15T15 [mm] "Chip Capacitor, 2-Leads, Body 1.60x0.81mm, IPC High Density"
  rect 0.85x0.9 smd: 1(-0.65,0) 2(0.65,0)
  body extent -0.88,-0.48 0.87,0.48, height 0.9
CAPC1608X90X35NL15T15 [mm] "Chip Capacitor, 2-Leads, Body 1.60x0.81mm, IPC Medium Density"
  rect 1.05x1 smd: 1(-0.75,0) 2(0.75,0)
  body extent -0.88,-0.48 0.87,0.48, height 0.9
CAPC2013X145X50ML20T25 [mm] "Chip Capacitor, 2-Leads, Body 2.00x1.25mm, IPC Low Density"
  rect 1.5x1.55 smd: 1(-0.9,0) 2(0.9,0)
  body extent -1.1,-0.72 1.1,0.72, height 1.45
CAPC2013X145X50NL20T25 [mm] "Chip Capacitor, 2-Leads, Body 2.00x1.25mm, IPC Medium Density"
  rect 1.3x1.45 smd: 1(-0.8,0) 2(0.8,0)
  body extent -1.1,-0.72 1.1,0.72, height 1.45
EQFP144_A-165_D2-54_M [mm] "Shrink QFP, 144-Leads, Body 20x20mm, Pitch 0.5mm, Thermal Pad 5.55x5.55mm, IPC Low Density"
  oval 2.1x0.3 smd: 1(-10.6,8.75) 2(-10.6,8.25) 3(-10.6,7.75) 4(-10.6,7.25) 5(-10.6,6.75) 6(-10.6,6.25) 7(-10.6,5.75) 8(-10.6,5.25) 9(-10.6,4.75) 10(-10.6,4.25) 11(-10.6,3.75) 12(-10.6,3.25) 13(-10.6,2.75) 14(-10.6,2.25) 15(-10.6,1.75) 16(-10.6,1.25) 17(-10.6,0.75) 18(-10.6,0.25) 19(-10.6,-0.25) 20(-10.6,-0.75) 21(-10.6,-1.25) 22(-10.6,-1.75) 23(-10.6,-2.25) 24(-10.6,-2.75) 25(-10.6,-3.25) 26(-10.6,-3.75) 27(-10.6,-4.25) 28(-10.6,-4.75) 29(-10.6,-5.25) 30(-10.6,-5.75) 31(-10.6,-6.25) 32(-10.6,-6.75) 33(-10.6,-7.25) 34(-10.6,-7.75) 35(-10.6,-8.25) 36(-10.6,-8.75) 73(10.6,-8.75) 74(10.6,-8.25) 75(10.6,-7.75) 76(10.6,-7.25) 77(10.6,-6.75) 78(10.6,-6.25) 79(10.6,-5.75) 80(10.6,-5.25) 81(10.6,-4.75) 82(10.6,-4.25) 83(10.6,-3.75) 84(10.6,-3.25) 85(10.6,-2.75) 86(10.6,-2.25) 87(10.6,-1.75) 88(10.6,-1.25) 89(10.6,-0.75) 90(10.6,-0.25) 91(10.6,0.25) 92(10.6,0.75) 93(10.6,1.25) 94(10.6,1.75) 95(10.6,2.25) 96(10.6,2.75) 97(10.6,3.25) 98(10.6,3.75) 99(10.6,4.25) 100(10.6,4.75) 101(10.6,5.25) 102(10.6,5.75) 103(10.6,6.25) 104(10.6,6.75) 105(10.6,7.25) 106(10.6,7.75) 107(10.6,8.25) 108(10.6,8.75)
  oval 0.3x2.1 smd: 37(-8.75,-10.6) 38(-8.25,-10.6) 39(-7.75,-10.6) 40(-7.25,-10.6) 41(-6.75,-10.6) 42(-6.25,-10.6) 43(-5.75,-10.6) 44(-5.25,-10.6) 45(-4.75,-10.6) 46(-4.25,-10.6) 47(-3.75,-10.6) 48(-3.25,-10.6) 49(-2.75,-10.6) 50(-2.25,-10.6) 51(-1.75,-10.6) 52(-1.25,-10.6) 53(-0.75,-10.6) 54(-0.25,-10.6) 55(0.25,-10.6) 56(0.75,-10.6) 57(1.25,-10.6) 58(1.75,-10.6) 59(2.25,-10.6) 60(2.75,-10.6) 61(3.25,-10.6) 62(3.75,-10.6) 63(4.25,-10.6) 64(4.75,-10.6) 65(5.25,-10.6) 66(5.75,-10.6) 67(6.25,-10.6) 68(6.75,-10.6) 69(7.25,-10.6) 70(7.75,-10.6) 71(8.25,-10.6) 72(8.75,-10.6) 109(8.75,10.6) 110(8.25,10.6) 111(7.75,10.6) 112(7.25,10.6) 113(6.75,10.6) 114(6.25,10.6) 115(5.75,10.6) 116(5.25,10.6) 117(4.75,10.6) 118(4.25,10.6) 119(3.75,10.6) 120(3.25,10.6) 121(2.75,10.6) 122(2.25,10.6) 123(1.75,10.6) 124(1.25,10.6) 125(0.75,10.6) 126(0.25,10.6) 127(-0.25,10.6) 128(-0.75,10.6) 129(-1.25,10.6) 130(-1.75,10.6) 131(-2.25,10.6) 132(-2.75,10.6) 133(-3.25,10.6) 134(-3.75,10.6) 135(-4.25,10.6) 136(-4.75,10.6) 137(-5.25,10.6) 138(-5.75,10.6) 139(-6.25,10.6) 140(-6.75,10.6) 141(-7.25,10.6) 142(-7.75,10.6) 143(-8.25,10.6) 144(-8.75,10.6)
  rect 5.5x5.5 smd: 145(0,0)
  silkscreen extent -10.72,-9.15 9.15,9.57, body extent -10,-10 10,10, height 1.65
ESWI-EG1218_V [mm] "THD, 3-Leads, Body 11.6x4mm, Pitch 2.5mm"
  rect 1.5x1.5 hole 1: 1(-2.5,0)
  round 1.5 hole 1: 2(0,0) 3(2.5,0)
  silkscreen extent -5.8,-2 5.8,2.77, body extent -5.8,-2 5.8,2, height 7.4
FP-AC0603-IPC_A [mil]
  rect 41.68x39.85 smd paste+0 mask+0: 1(-34.52,0) 2(34.52,0)
  silkscreen extent -55,-36 55,36, body extent -75,-40 75,40, height 10
FP-ASEM-MFG [mm]
  rect 0.9x1 smd paste+0 mask+0: 1(-1.05,-0.95) 2(1.05,-0.95) 3(1.05,0.95) 4(-1.05,0.95)
  silkscreen extent -1.92,-2.12 1.92,1.28, body extent -1.73,-1.55 1.73,1.55, height 0.25
FP-ASEMB-MFG [mm]
  rect 0.9x1 smd paste+0 mask+0: 1(-1.05,-0.95) 2(1.05,-0.95) 3(1.05,0.95) 4(-1.05,0.95)
  silkscreen extent -1.63,-2.15 1.63,1.28, body extent -1.73,-1.55 1.73,1.55, height 0.25
FP-C1608-080-0_1-IPC_B [mil]
  rect 44.53x35.91 smd paste+0 mask+0: 1(-25.22,0) 2(25.22,0)
  silkscreen extent -47,-34 47,34, body extent -31,-16 31,16, height 35
FP-CR0402-IPC_A [mil]
  rect 28.16x26.48 smd paste+0 mask+0: 1(-18.84,0) 2(18.84,0)
  silkscreen extent -33,-29 33,29, body extent -20,-10 20,10, height 16
FP-DBV0005A-MFG [mm]
  rrect17% 1.1x0.6 smd paste+0 mask+0: 1(-1.3,0.95) 2(-1.3,0) 3(-1.3,-0.95) 4(1.3,-0.95) 5(1.3,0.95)
  silkscreen extent -2.55,-1.53 0.87,1.52, body extent -1.95,-1.78 1.95,1.78, height 0.25
FP-GCG188-0_2-IPC_B [mil]
  rect 41.54x35.91 smd paste+0 mask+0: 1(-28.56,0) 2(28.56,0)
  silkscreen extent -49,-34 49,34, body extent -31,-16 31,16, height 36
FP-GRM033-0_03-MFG [mm]
  rect 0.25x0.3 smd paste+0 mask+0: 1(-0.238,0) 2(0.238,0)
  silkscreen extent -0.32,-0.54 0.32,0.54, body extent -0.46,-0.27 0.46,0.27, height 0.25
FP-GRM219-0_15-0_1-IPC_B [mil]
  rect 47.47x55.44 smd paste+0 mask+0: 1(-32.53,0) 2(32.53,0)
  silkscreen extent -56,-43 56,43, body extent -66,-38 66,38, height 10
FP-GRT21B-0_2-IPC_C [mil]
  rect 41.52x53.39 smd paste+0 mask+0: 1(-28.57,0) 2(28.57,0)
  silkscreen extent -49,-44 49,44, body extent -53,-32 53,32, height 10
FP-LGA12-DM00170568-MFG [mm]
  rect 0.375x0.35 smd paste+0 mask+0: 1(-0.763,0.75) 2(-0.763,0.25) 3(-0.763,-0.25) 4(-0.763,-0.75) 7(0.763,-0.75) 8(0.763,-0.25) 9(0.763,0.25) 10(0.763,0.75)
  rect 0.35x0.375 smd paste+0 mask+0: 5(-0.25,-0.763) 6(0.25,-0.763) 11(0.25,0.763) 12(-0.25,0.763)
  silkscreen extent -2,-1.33 1.33,1.33, body extent -1.55,-1.55 1.55,1.55, height 0.25
FP-LQG15HH_02-MFG [mm]
  rect 0.4x0.5 smd paste+0 mask+0: 1(-0.4,0) 2(0.4,0)
  silkscreen extent -1.27,-0.64 0.53,0.65, body extent -0.7,-0.38 0.7,0.38, height 0.25
FP-LTST-C170GKT-MFG [mm]
  rect 1.2x1.2 smd paste+0 mask+0: 1(-1.05,0) 2(1.05,0)
  silkscreen extent -2.35,-0.67 0.08,0.67, body extent -1.75,-0.77 1.75,0.77, height 0.25
FP-LW_T6SH_CB-CZEY-FK0PM0-MFG [mm]
  rect 1.5x2.6 smd paste+0 mask+0: 1(-1.5,0) 2(1.5,0)
  silkscreen extent -2.92,-1.5 0.37,1.5, body extent -2.35,-1.6 2.35,1.6, height 0.25
FP-MLP2012M-IPC_C [mil]
  rect 45.45x53.39 smd paste+0 mask+0: 1(-26.61,0) 2(26.61,0)
  silkscreen extent -49,-44 49,44, body extent -53,-32 53,32, height 10
FP-RC0402-0_4-MFG [mm]
  rect 0.5x0.6 smd paste+0 mask+0: 1(-0.5,0) 2(0.5,0)
  silkscreen extent -0.5,-0.67 0.5,0.67, body extent -0.85,-0.4 0.85,0.4, height 0.25
FP-RC0603-0_55-IPC_C [mil]
  rect 25.93x31.97 smd paste+0 mask+0: 1(-26.64,0) 2(26.64,0)
  silkscreen extent -40,-33 40,33, body extent -44,-22 44,22, height 10
FP-RT0402-0_35-MFG [mm]
  rect 0.5x0.6 smd paste+0 mask+0: 1(-0.5,0) 2(0.5,0)
  silkscreen extent -0.5,-0.71 0.5,0.7, body extent -0.85,-0.4 0.85,0.4, height 0.25
FP-RT0402-MFG [mm]
  rect 0.5x0.6 smd paste+0 mask+0: 1(-0.5,0) 2(0.5,0)
  silkscreen extent -0.5,-0.71 0.5,0.7, body extent -0.85,-0.4 0.85,0.4, height 0.25
FP-S-03946-MFG [mm]
  rect 0.724x0.559 smd paste+0 mask+0: 1(-0.984,0.95) 2(-0.984,-0.95) 3(0.984,0)
  silkscreen extent -0.25,-1.52 0.7,1.52, body extent -1.27,-1.46 1.27,1.46, height 1.12
FP-SG3225-MFG [mm]
  rect 0.86x1.05 smd paste+0 mask+0: 1(-1.29,-0.925) 3(1.29,-0.925) 4(1.29,0.925) 6(-1.29,0.925)
  rect 0.82x1.05 smd paste+0 mask+0: 2(0,-0.925) 5(0,0.925)
  silkscreen extent -2.1,-2.38 2.1,1.85, body extent -1.82,-1.55 1.82,1.55, height 0.25
FP-TFCR0402-IPC_B [mil]
  rect 22.26x22.54 smd paste+0 mask+0: 1(-17.86,0) 2(17.86,0)
  silkscreen extent -29,-27 29,27, body extent -20,-10 20,10, height 14
FP-UFQFPN28-A0B0-MFG [mm]
  round 0.27 smd paste+0 mask+0: 1(-1.9,1.5) 7(-1.9,-1.5) 8(-1.5,-1.9) 14(1.5,-1.9) 15(1.9,-1.5) 21(1.9,1.5) 22(1.5,1.9) 28(-1.5,1.9)
  rect 0.55x0.3 smd paste+0 mask+0: 2(-1.875,1) 3(-1.875,0.5) 4(-1.875,0) 5(-1.875,-0.5) 6(-1.875,-1) 16(1.875,-1) 17(1.875,-0.5) 18(1.875,0) 19(1.875,0.5) 20(1.875,1)
  rect 0.3x0.55 smd paste+0 mask+0: 9(-1,-1.875) 10(-0.5,-1.875) 11(0,-1.875) 12(0.5,-1.875) 13(1,-1.875) 23(1,1.875) 24(0.5,1.875) 25(0,1.875) 26(-0.5,1.875) 27(-1,1.875)
  Top Layer region: -1.35,1.65 -1.48,1.65 -1.65,1.82 -1.65,2.15 -1.35,2.15 -1.35,1.65
  Top Layer region: 1.35,1.65 1.48,1.65 1.65,1.82 1.65,2.15 1.35,2.15 1.35,1.65
  Top Layer region: 1.35,-1.65 1.48,-1.65 1.65,-1.82 1.65,-2.15 1.35,-2.15 1.35,-1.65
  Top Layer region: -1.35,-1.65 -1.48,-1.65 -1.65,-1.82 -1.65,-2.15 -1.35,-2.15 -1.35,-1.65
  Top Layer region: -1.65,1.35 -1.65,1.48 -1.82,1.65 -2.15,1.65 -2.15,1.35 -1.65,1.35
  Top Layer region: 1.65,1.35 1.65,1.48 1.82,1.65 2.15,1.65 2.15,1.35 1.65,1.35
  Top Layer region: 1.65,-1.35 1.65,-1.48 1.82,-1.65 2.15,-1.65 2.15,-1.35 1.65,-1.35
  Top Layer region: -1.65,-1.35 -1.65,-1.48 -1.82,-1.65 -2.15,-1.65 -2.15,-1.35 -1.65,-1.35
  silkscreen extent -3.25,-2.52 2.52,2.52, body extent -2.25,-2.25 2.25,2.25, height 0.25
FP-USB4085-GF-A-MFG [mm]
  rrect100% 0.9x2.4 hole 2.1 slot 0.6 at 0 deg paste-2539.97 mask+0: 1(-4.325,3.045) 2(4.325,3.045)
  rrect100% 0.9x1.7 hole 1.4 slot 0.6 at 0 deg paste-2539.97 mask+0: 3(-4.325,-0.335) 4(4.325,-0.335)
  round 0.65 hole 0.4 paste-2539.97 mask+0: A1(-2.975,4.025) A4(-2.125,4.025) A5(-1.275,4.025) A6(-0.425,4.025) A7(0.425,4.025) A8(1.275,4.025) A9(2.125,4.025) A12(2.975,4.025) B1(2.975,2.675) B4(2.125,2.675) B5(1.275,2.675) B6(0.425,2.675) B7(-0.425,2.675) B8(-1.275,2.675) B9(-2.125,2.675) B12(-2.975,2.675)
  silkscreen extent -4.57,0.89 4.57,5.37, body extent -4.87,-4.83 4.87,4.83, height 0.25
JU6_MFG [mm] "Recommended Land Pattern"
  rect 2x1.8 smd paste+0 mask+0: 1(-2.1,2.54) 2(-2.1,0) 3(-2.1,-2.54) 4(2.1,-2.54) 5(2.1,0) 6(2.1,2.54)
  silkscreen extent -2.97,-3.64 0.72,4.09, body extent -2.5,-3.5 2.5,3.5, height 1.45
ONSC-SOD-123-2-425-04_V [mm] "SOD, 2-Leads, Body 2.69x1.6mm"
  rect 0.91x1.22 smd: 1(-1.635,0) 2(1.635,0)
  silkscreen extent -1.76,-0.8 0.78,1.28, body extent -1.35,-0.8 1.35,0.8, height 1.35
ONSC-SOT-23-3-318-08_V [mm] "SOT23, 3-Leads, Body 2.92x1.3mm, Pitch 0.95mm"
  rect 0.9x0.8 smd: 1(-1,0.95) 2(-1,-0.95) 3(1,0)
  silkscreen extent -1.12,-1.46 0.65,2.02, body extent -0.65,-1.46 0.65,1.46, height 1.11
RESC0603(1608)_N [mm] "Chip Resistor, Body 1.6x0.8mm, IPC Medium Density"
  rect 0.9x1 smd: 1(-0.8,0) 2(0.8,0)
  silkscreen extent -0.05,-0.4 0.05,0.4, body extent -0.85,-0.47 0.85,0.47, height 0.6
RESC1005X40X25NL05T05 [mm] "Chip Resistor, 2-Leads, Body 1.05x0.55mm, IPC Medium Density"
  rect 0.55x0.55 smd: 1(-0.45,0) 2(0.45,0)
  body extent -0.53,-0.28 0.53,0.28, height 0.4
RESC1005X40X25NL05T10 [mm] "Chip Resistor, 2-Leads, Body 1.00x0.50mm, IPC Medium Density"
  rect 0.6x0.55 smd: 1(-0.425,0) 2(0.425,0)
  body extent -0.53,-0.27 0.53,0.28, height 0.4
RESC1608X55X25ML10T15 [mm] "Chip Resistor, 2-Leads, Body 1.60x0.80mm, IPC Low Density"
  rect 0.8x1 smd: 1(-0.75,0) 2(0.75,0)
  body extent -0.85,-0.45 0.85,0.45, height 0.55
RESC2013X50X30NL20T20 [mm] "Chip Resistor, 2-Leads, Body 2.00x1.25mm, IPC Medium Density"
  rect 1.05x1.45 smd: 1(-0.925,0) 2(0.925,0)
  silkscreen extent -0.1,-0.63 0.1,0.63, body extent -1.1,-0.72 1.1,0.72, height 0.5
SAMTEC_FTSH-107-01-F-DV-K-P-TR [mm]
  rect 0.74x2.79 smd: 01(-3.81,-2.035) 02(-3.81,2.035) 03(-2.54,-2.035) 04(-2.54,2.035) 05(-1.27,-2.035) 06(-1.27,2.035) 07(0,-2.035) 08(0,2.035) 09(1.27,-2.035) 10(1.27,2.035) 11(2.54,-2.035) 12(2.54,2.035) 13(3.81,-2.035) 14(3.81,2.035)
  silkscreen extent -5.2,-2.13 4.53,1.72
SOP80P1176X120-54N [mm]
  rect 1.295x0.6 smd: 1(-5.728,10.4) 2(-5.728,9.6) 3(-5.728,8.8) 4(-5.728,8) 5(-5.728,7.2) 6(-5.728,6.4) 7(-5.728,5.6) 8(-5.728,4.8) 9(-5.728,4) 10(-5.728,3.2) 11(-5.728,2.4) 12(-5.728,1.6) 13(-5.728,0.8) 14(-5.728,0) 15(-5.728,-0.8) 16(-5.728,-1.6) 17(-5.728,-2.4) 18(-5.728,-3.2) 19(-5.728,-4) 20(-5.728,-4.8) 21(-5.728,-5.6) 22(-5.728,-6.4) 23(-5.728,-7.2) 24(-5.728,-8) 25(-5.728,-8.8) 26(-5.728,-9.6) 27(-5.728,-10.4) 28(5.728,-10.4) 29(5.728,-9.6) 30(5.728,-8.8) 31(5.728,-8) 32(5.728,-7.2) 33(5.728,-6.4) 34(5.728,-5.6) 35(5.728,-4.8) 36(5.728,-4) 37(5.728,-3.2) 38(5.728,-2.4) 39(5.728,-1.6) 40(5.728,-0.8) 41(5.728,0) 42(5.728,0.8) 43(5.728,1.6) 44(5.728,2.4) 45(5.728,3.2) 46(5.728,4) 47(5.728,4.8) 48(5.728,5.6) 49(5.728,6.4) 50(5.728,7.2) 51(5.728,8) 52(5.728,8.8) 53(5.728,9.6) 54(5.728,10.4)
  silkscreen extent -6.38,-11.11 4.73,11.11, body extent -5.88,-11.11 5.88,11.11, height 1.2
SOT-23_DMP3068L_DIO [mil]
  rect 22x50 smd paste+0 mask+0: 1(-36.02,-39) 2(36.02,-39) 3(0,39)
  silkscreen extent -114,-55 64,33, body extent -59,-50 59,50, height 45
WL-SMCW_0603_150060xx75000 [mm] "SMD Mono-color Chip LED, body 1.60 x 0.80 mm"
  rect 0.8x0.8 smd: 1(-0.8,0) 2(0.8,0)
  silkscreen extent -1.55,-0.4 -1.4,0.4, body extent -0.8,-0.4 0.8,0.4, height 0.7

## Part data
3_1 D1_1 D2_1 D4_1 D5_1 D6_1 D7_1 D8_1 D9_1: library part CMP-62016-000075-1, "TOPLED"
"100MHZ CLK": library part CMP-27762-005945-1, "MEMS OSC XO 100.0000MHZ CMOS SMD", Case/Package=SMD/SMT, Frequency=100MHz, Frequency Stability=50ppm, Load Capacitance=15pF, Max Operating Temperature=85°C, Max Supply Current=10mA, Max Supply Voltage=3.6V, Min Operating Temperature=-40°C, Min Supply Voltage=3V, Operating Supply Voltage=3.3V, Height=0.035inch, Lead Free="Lead Free", Length=0.126inch, Mount="Surface Mount", Number of Pins=4, Packaging="Tape and Reel", Radiation Hardening=No, Series="Pure Silicon™ ASEM", Width=0.098inch
"250 MHZ CLK": library part CMP-36405-000003-1, "XTAL OSC XO 250.0000MHZ LVDS SMD", Frequency=250MHz, Manufacturer=EPSON, Max Supply Current=30mA, Max Supply Voltage=3.3V, Min Supply Voltage=2.5V, Package=SG3225, Temperature="-40°C to +85°C", Temperature Range High=+85°C, Temperature Range Low=-40°C, Automotive=No, Category=Crys, ComponentLink2Description=Datasheet, ComponentLink2URL=https://support.epson.biz/td/api/doc_check.php?dl=brief_SG5032VAN&lang=en, Device Class L1="Passive Components", Device Class L2="Crystals / Oscillators", Device Class L3=Oscillators, Digikey Description="XTAL OSC XO 250.0000MHZ LVDS SMD", Height=1.2mm, Lead Free=Yes, Manufacturer Part Number="SG3225VAN 250.000000M-KEGA3", Mouser Description="Standard Clock Oscillators 250MHz 30ppm -40C +85C", Octopart=https://octopart.com/sg3225van+250.000000m-kega3-epson-56783964, RoHS=TRUE, Series=SG3225
B1: library part CMP-007-000000-1, "DRAM 256M, 3.3V, SDRAM 16Mx16 143MHz", Manufacturer_Name="Integrated Silicon Solution Inc.", Mouser Part Number=870-IS42S16160J-7TLI, Datasheet Link=http://www.issi.com/WW/pdf/42-45S83200J-16160J.pdf, Design Item ID=IS42S16160J-7TLI, Geometry.Height=1.2mm, Manufacturer_Part_Number=IS42S16160J-7TLI, Mouser Price/Stock=https://www.mouser.co.uk/ProductDetail/ISSI/IS42S16160J-7TLI?qs=uCnMRCNammmen%252BmWnq1g5A%3D%3D, Source=IS42S16160J-7TLI.SchLib
C7 C8 C9 C10: library part CMP-06035-011672-1, "Multi-Layer Ceramic Capacitor 22uF 25V X5R ±20% 0805 Emboss T/R", Capacitance=22uF, Case Code (Imperial)=0805, Case Code (Metric)=2012, Max Operating Temperature=85°C, Min Operating Temperature=-55°C, Ratings=AEC-Q200, Tolerance=20%, Voltage Rating=25V, Case/Package=0805, Length=0.079inch, Mount="Surface Mount", Packaging="Tape and Reel", Thickness=0.057inch, Width=0.049inch
C11 C12 C19 C20 C28: library part CMP-2006-02241-1, Manufacturer=Kemet, Part Number=C0603C105K9PACTU
C13 C18 C21: library part CMP-06035-011350-1, "AgPd Termination Conductive Glue Mounting Chip Multilayer Ceramic Capacitors for Automotive 0.1uF with 20% as tolerance, 50V X8R 15%, 0603 Package"
C14 C17 C22: library part CMP-2007-01090-1, Manufacturer=Kemet, Part Number=C0805S472K5RACTU
C15: library part CMP-2000-06025-2, "Multilayer Ceramic Capacitors 1μF ±10% 50V X5R SMD 0603", Capacitance=1uF, Case Code (Imperial)=0603, Case Code (Metric)=1608, Dielectric=X5R, Dielectric Material=Ceramic, Max Operating Temperature=85°C, Min Operating Temperature=-55°C, Package Quantity=1, Tolerance=10%, Voltage=50V, Case/Package=0603, Construction=Flat, Depth=0.8mm, Height=0.8mm, Lead Free="Lead Free", Length=1.6mm, Mount="Surface Mount", Number of Pins=2, Packaging="Tape and Reel", Radiation Hardening=No, REACH SVHC="No SVHC", Resistor Type=Ceramic, RoHS Compliant=Yes, Series=C, Termination=SMD/SMT, Thickness=0.035inch, Voltage Rating=50V, Voltage Rating (DC)=50V, Weight=7.1E-05oz, Width=0.031inch
C16: library part CMP-2006-03288-1, Manufacturer=Kemet, Part Number=C0603S102K4RACTU
C23 C26: library part CMP-2006-02157-1, Manufacturer="AVX Interconnect / Elco", Part Number=LD033C104KAB2A
C24 C27: library part CMP-06035-028467-1, "Chip Multilayer Ceramic Capacitors for General Purpose, 0805, 4.7uF, X5R, 15%, 20%, 25V"
C_CLK C_CLK_4 C_CLKt: library part CMP-06035-019037-1, "Chip Multilayer Ceramic Capacitors for General Purpose, 0201, 0.10uF, X7S, 22%, 10%, 16V", Capacitance=100nF, Case Code (Imperial)=0201, Case Code (Metric)=0603, Dielectric=X7S, Max Operating Temperature=125°C, Min Operating Temperature=-55°C, Package Quantity=15000, Tolerance=10%, Voltage Rating=16V, Case/Package=0201, Height=0.3mm, Length=0.024inch, Mount="Surface Mount", Packaging="Tape and Reel", Termination=SMD/SMT, Thickness=0.013inch, Voltage Rating (DC)=16V, Weight=1.2E-05oz, Width=0.3mm
C_CLK_1 C_CLK_3 C_CLK_t5: library part CMP-2007-01022-1, Manufacturer=Kemet, Part Number=C0805C105K8PACTU
CJ_1 CJ_2: library part CMP-1037-04188-1, "CAP 100nF 25V ±5% 1206 (3216 Metric) Thickness 1.7mm SMD", Case-EIA=1206, Case-Metric=3216, Rated Voltage="25 V", Tolerance=Â±5%, Max Thickness="1.7 mm", Technology=SMT
D1: library part CMP-1060-00510-1, "Zener Voltage Regulator, 500 mW, 2-Pin SOD-123, Pb-Free, Tape and Reel", Manufacturer="On Semiconductor", ComponentLink1Description="Manufacturer URL", ComponentLink1URL=http://www.onsemi.com/, ComponentLink2Description=Datasheet, ComponentLink2URL=http://www.onsemi.com/pub_link/Collateral/MMSZ4678T1-D.PDF, ComponentLink3Description="Package Specification", ComponentLink3URL=http://www.onsemi.com/pub_link/Collateral/425-04.PDF, DatasheetVersion="Rev. 9", Mounting Technology="Surface Mount", P Max (W)=0.5, PackageDescription="2-Pin SOD, Body 1.6 x 2.69 mm", PackageReference=SOD-123-2-425-04, PackageVersion="Rev. G, 10/2009", Packing="Tape and Reel", PartNumber=SZMMSZ4678T1G, RoHS=Pb-Free, VZ Typ (V)=1.8